# EAGLE board OpenBook (EAGLE 9.7.0)
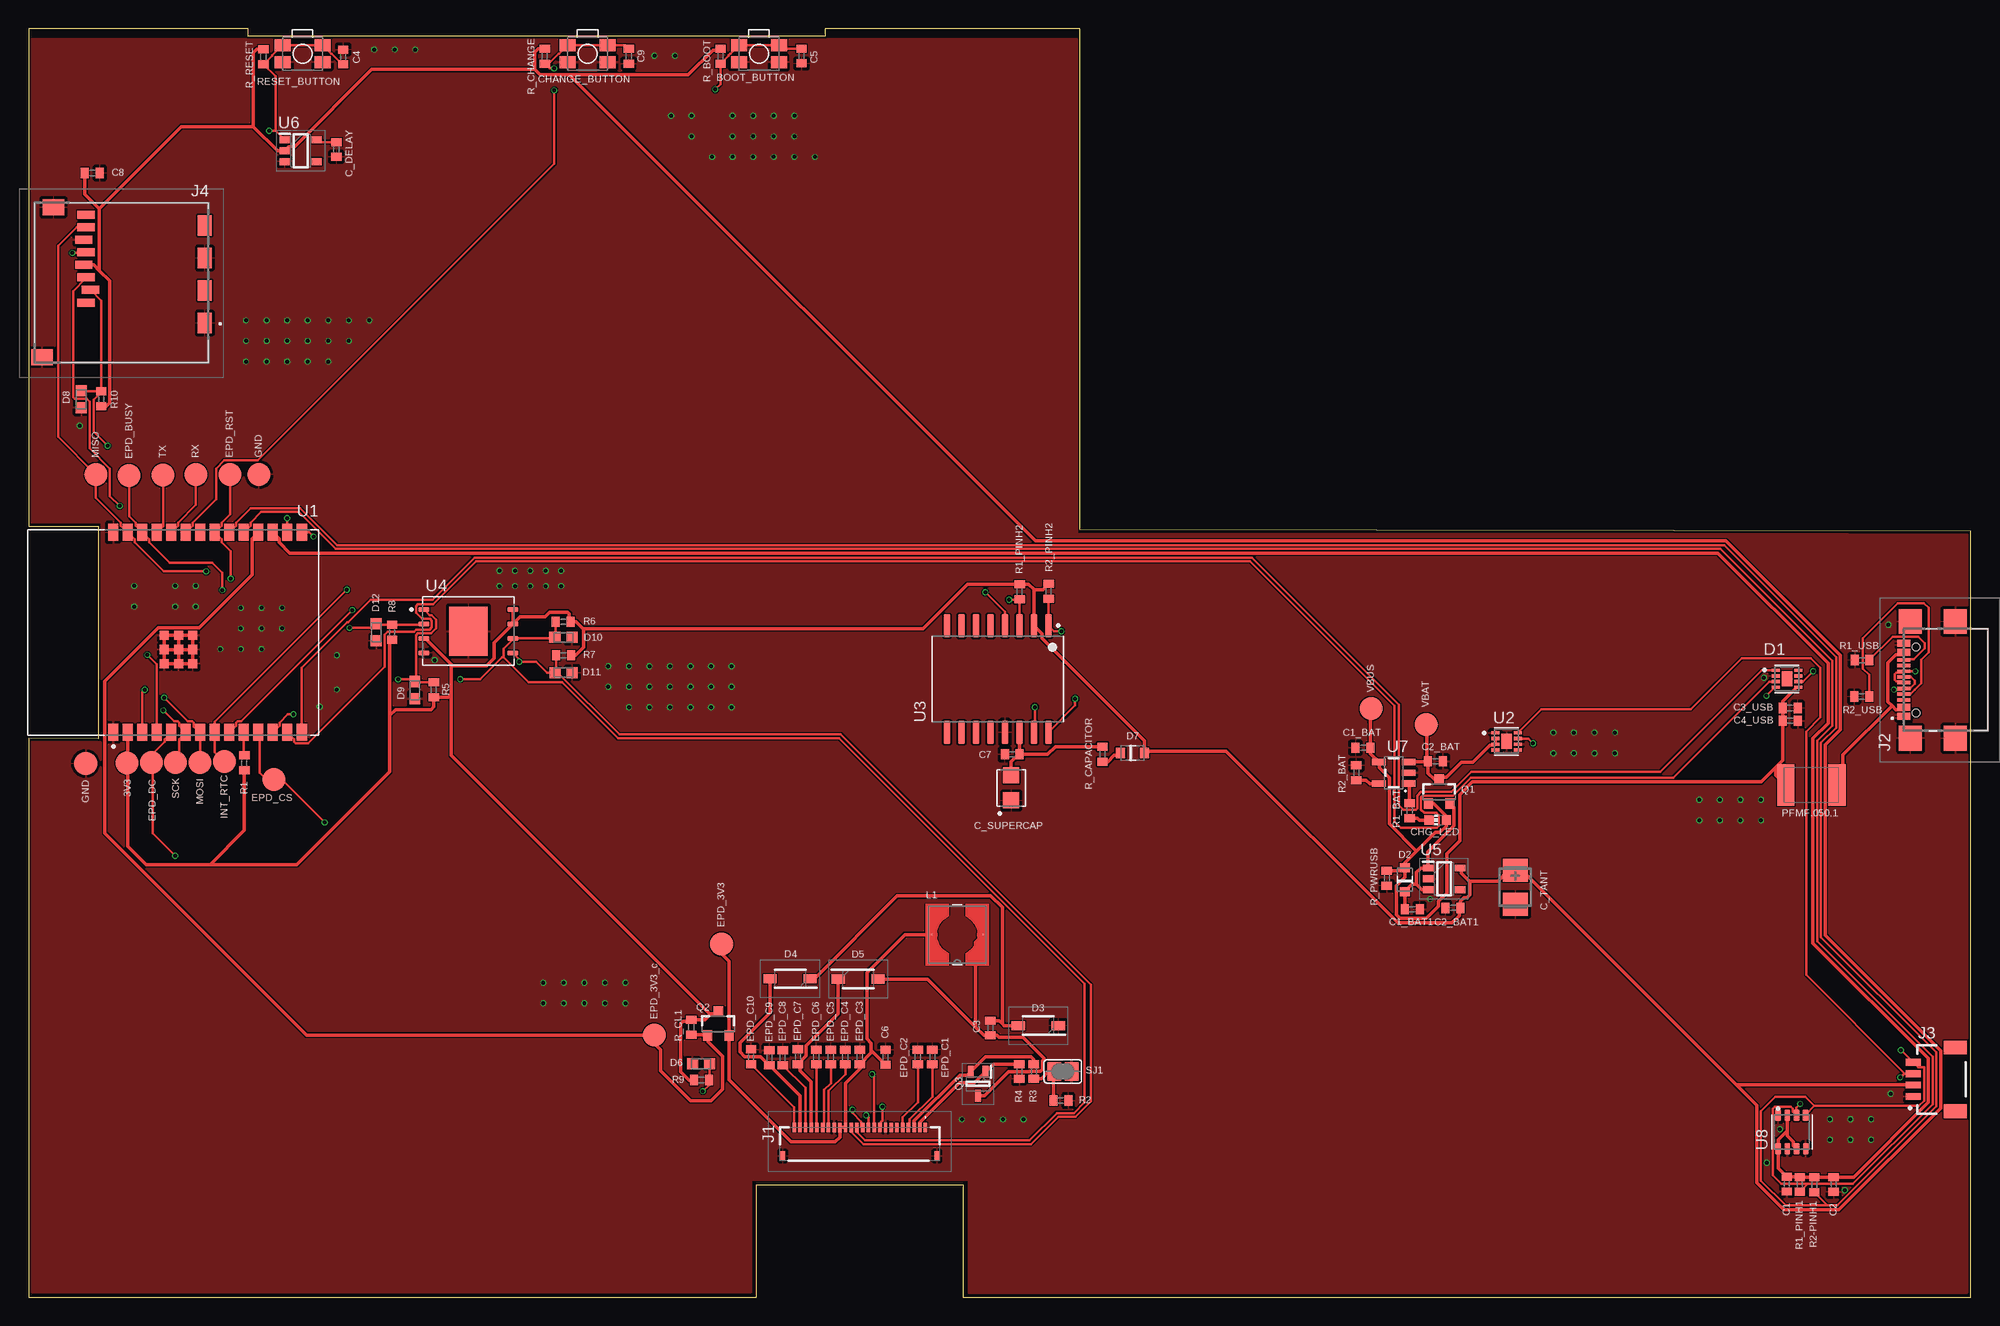
[diagram p0: board, top side]
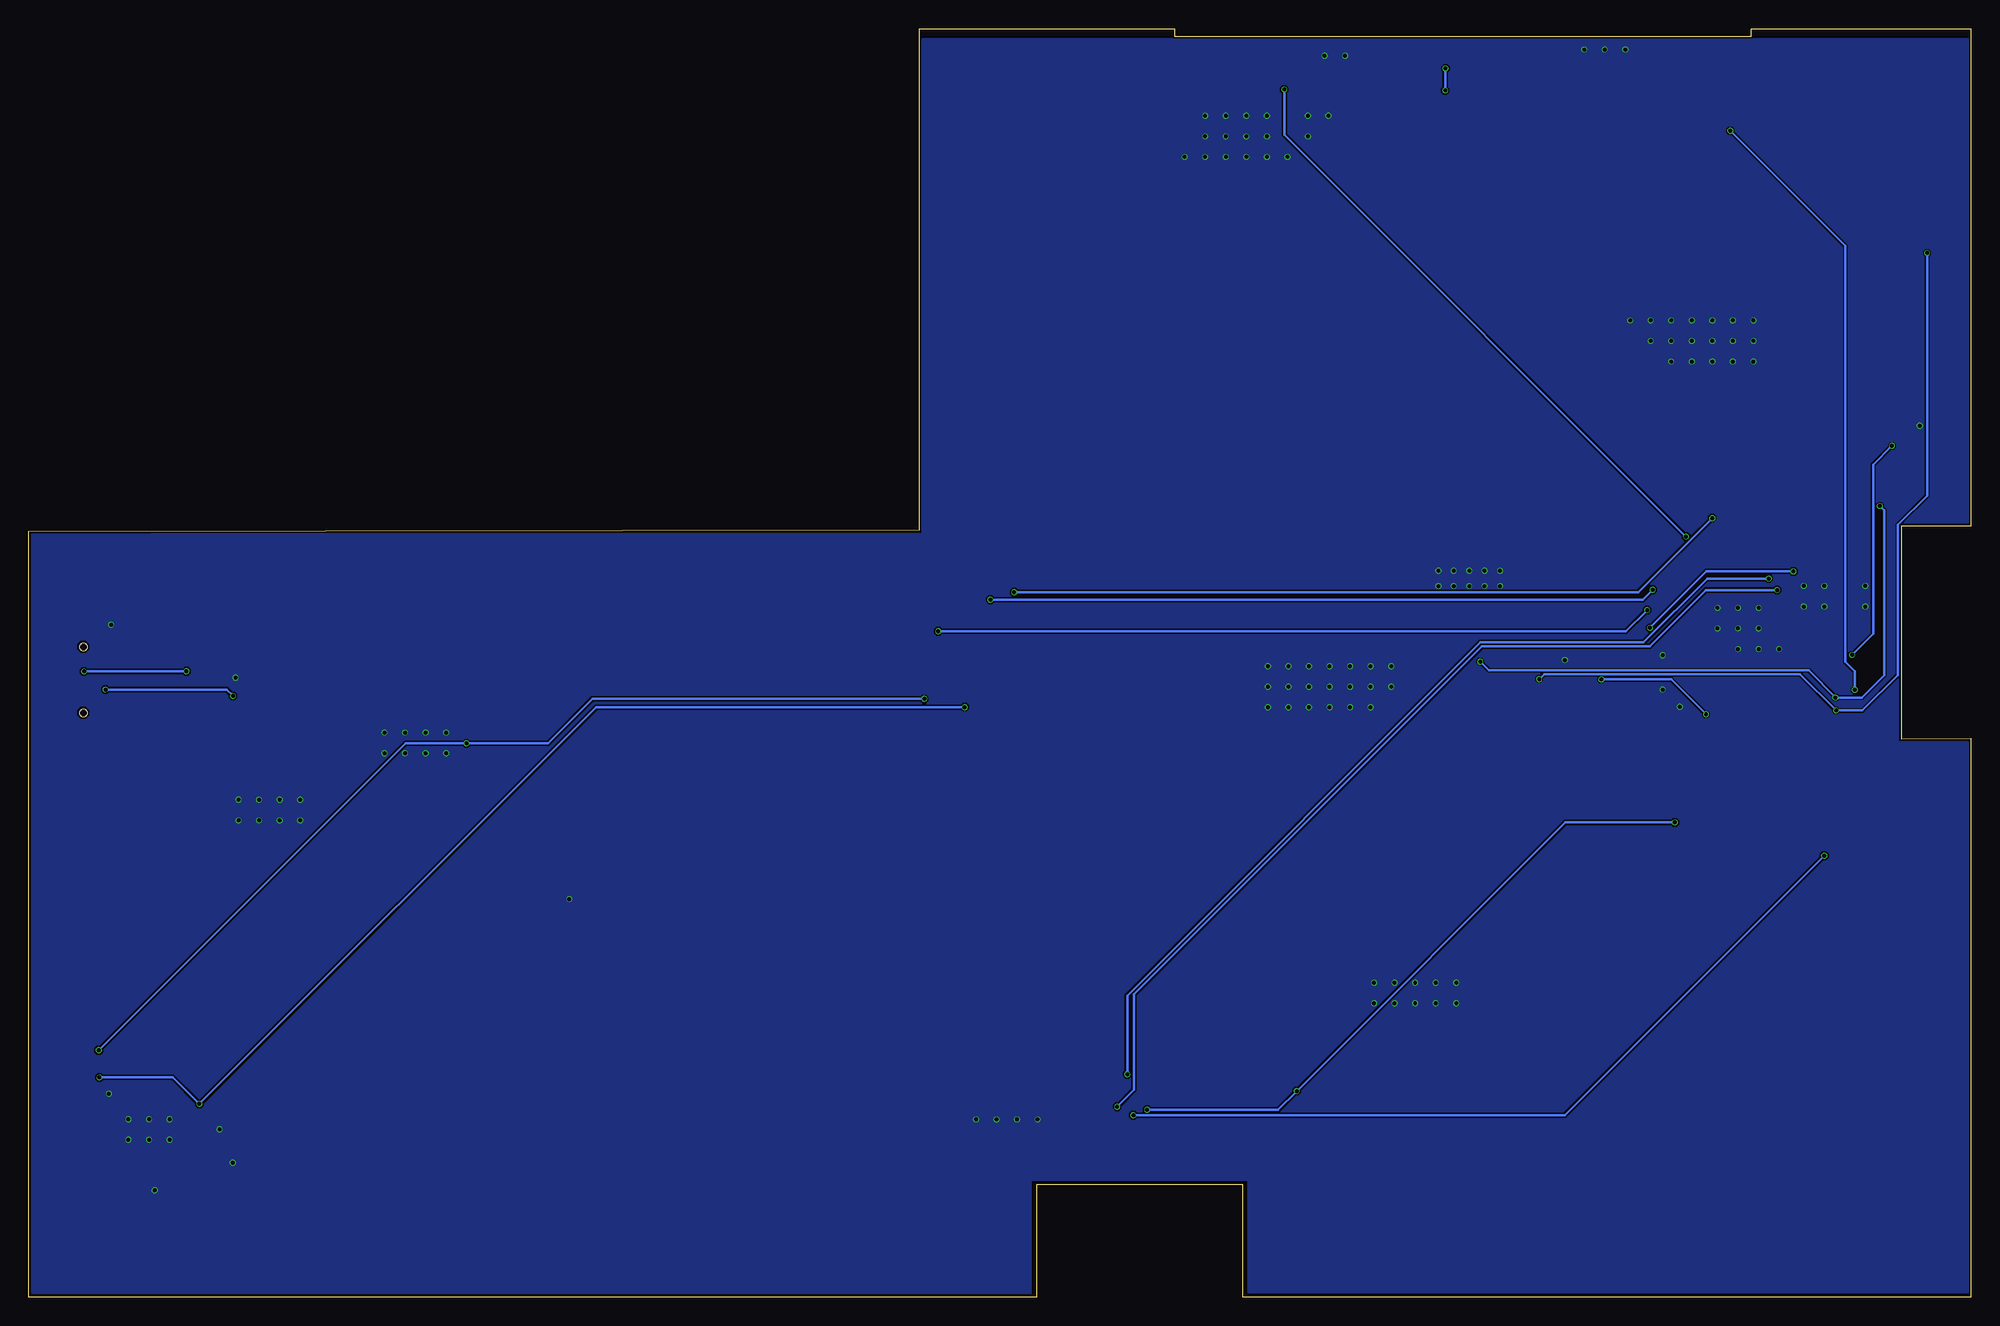
[diagram p1: board, bottom side, seen from below]

Size 170.08 x 111.07 mm. Coordinates in mm from the lower left corner, seen from the top.
Outline: 0,0 63.76,0 63.76,9.87 81.82,9.87 81.82,0.01 131.18,0 170.08,0 170.08,67.07 92.07,67.2 92.07,111.07 69.75,111.07 69.75,110.38 19.21,110.38 19.21,111.07 0,111.07 0,67.51 6.11,67.5 6.11,48.92 0,48.93 0,0
Outline: 0,0 0,0
Copper layers (1*16): Top / Bottom
Stack-up Default Layer Stack: Top User Defined 0.035mm / Dielectric-1 Core:086 1mm / Bottom User Defined 0.035mm
Design rules: minimum copper width 0.2mm, minimum drill size 0.3mm, copper clearance wire_polygon to wire_polygon 5mil, copper clearance wire_polygon to pad_smd 5mil, copper clearance wire_polygon to via 5mil, copper clearance pad_smd to pad_smd 5mil, copper clearance pad_smd to via 5mil, copper clearance via to via 5mil, copper clearance smd to pad (same net) 5mil, copper clearance smd to via (same net) 5mil, copper clearance smd to smd (same net) 5mil, dimension clearance 0.2mm, restrict clearance 0mil, via restrict clearance 0mil, solder-mask clearance 0mil, drill distance 6mil, keepout clearance 0mil

## Footprints (pad centres in the part's own frame; a part is rotated, then mirrored left to right if it is on the bottom)
MYBUTTON = smd 1.4 x 1.05: 1 1.75,0.75; 2 -1.75,0.75; 3 -1.75,-0.75; 4 1.75,-0.75
EAGLE-LTSPICE_C0402 = smd 0.7 x 0.9: 1 -0.65,0; 2 0.65,0
CAPCP3225X100N = smd 1.4 x 1.4: 1 -1.1,0; 2 1.1,0
RCL_CT3528 = smd 2 x 2.2: + -1.5,0; - 1.5,0
ADAFRUIT_CHIP-LED0603 = smd 0.8 x 0.8: A 0,-0.75; C 0,0.75
SON50P200X200X80-9N = smd 0.76 x 0.27: 1 -0.985,0.75; 2 -0.985,0.25; 3 -0.985,-0.25; 4 -0.985,-0.75; 5 0.985,-0.75; 6 0.985,-0.25; 7 0.985,0.25; 8 0.985,0.75 | smd 0.9 x 1.3: 9 0,0
ESP32_WROVER_AVX---SD0805S020S1R0_AVX_SD0805S020S1R0_0 = smd 0.8 x 0.9: 1 -1.05,0; 2 1.05,0
SOD3716X135N = smd 1.15 x 0.8: 1 -1.75,0; 2 1.75,0
DIOC1608X36N = smd 0.97 x 0.94: 1 -0.75,0; 2 0.75,0
FH34SRJ24S05SH99 = smd 0.3 x 0.8: 1 5.75,1.45; 2 5.25,1.45; 3 4.75,1.45; 4 4.25,1.45; 5 3.75,1.45; 6 3.25,1.45; 7 2.75,1.45; 8 2.25,1.45; 9 1.75,1.45; 10 1.25,1.45; 11 0.75,1.45; 12 0.25,1.45; 13 -0.25,1.45; 14 -0.75,1.45; 15 -1.25,1.45; 16 -1.75,1.45; 17 -2.25,1.45; 18 -2.75,1.45; 19 -3.25,1.45; 20 -3.75,1.45; 21 -4.25,1.45; 22 -4.75,1.45; 23 -5.25,1.45; 24 -5.75,1.45 | smd 0.4 x 0.8: MP1 6.75,-1.05; MP2 -6.75,-1.05
SAMACSYS_PARTS_USB4110GFA = smd 0.3 x 1.15: A1 -3.35,3.678; A4 -2.55,3.678; A5 -1.25,3.678; A6 -0.25,3.678; A7 0.25,3.678; A8 1.25,3.678; A9 2.55,3.678; A12 3.35,3.678; B1 3.05,3.678; B4 2.25,3.678; B5 1.75,3.678; B6 0.75,3.678; B7 -0.75,3.678; B8 -1.75,3.678; B9 -2.25,3.678; B12 -3.05,3.678 | smd 2.18 x 2: MP1 -5.11,-0.827; MP2 5.11,-0.827; MP3 -5.11,3.103; MP4 5.11,3.103 | hole 0.65: -2.89,2.603; 2.89,2.603
JST04_1MM_RA = smd 0.6 x 1.35: 1 -1.5,0; 2 -0.5,0; 3 0.5,0; 4 1.5,0 | smd 1.2 x 2: NC1 2.8,-3.675; NC2 -2.8,-3.675
112ATAARR03ATTEND = smd 1.8 x 1.2: G1 10.6,10.4; G2 4.9,10.4; S1 7.75,10.4; S2 2.05,10.4 | smd 1.4 x 1.9: G3 13.6,-3.85; G4 0.45,-2.85 | smd 0.7 x 1.5: P1 8.8,0; P2 7.7,0.4; P3 6.6,0; P4 5.5,-0.2; P5 4.4,0; P6 3.3,-0.2; P7 2.2,0; P8 1.1,0
IND_4828-WE-TPC_WRE = smd 0.127 x 0.127: 1 -2.286,0; 2 2.286,0
ESP32C6_VARISTOR_CT/CN1812 = smd 1.5 x 3.6: 1 -2.25,0; 2 2.25,0
ESP32_WROVER_SPARKFUN-DISCRETESEMI_SOT23-3 = smd 0.8 x 0.9: 1 -0.95,-1; 2 0.95,-1; 3 0,1.1
SOT65P210X110-3N = smd 1.05 x 0.5: 1 -1.05,0.65; 2 -1.05,-0.65; 3 1.05,0
ESP32_WROVER_EAGLE-LTSPICE_R0402 = smd 0.7 x 0.9: 1 -0.65,0; 2 0.65,0
SJ = smd 1.168 x 1.6: 1 -0.762,0; 2 0.762,0
TP20R = smd 2 x 2: TP 0,0
XCVR_ESP32-C6-WROOM-1-N8 = smd 1.5 x 0.9: 1 -8.75,5.26; 2 -8.75,3.99; 3 -8.75,2.72; 4 -8.75,1.45; 5 -8.75,0.18; 6 -8.75,-1.09; 7 -8.75,-2.36; 8 -8.75,-3.63; 9 -8.75,-4.9; 10 -8.75,-6.17; 11 -8.75,-7.44; 12 -8.75,-8.71; 13 -8.75,-9.98; 14 -8.75,-11.25; 15 8.75,-11.25; 16 8.75,-9.98; 17 8.75,-8.71; 18 8.75,-7.44; 19 8.75,-6.17; 20 8.75,-4.9; 21 8.75,-3.63; 22 8.75,-2.36; 23 8.75,-1.09; 24 8.75,0.18; 25 8.75,1.45; 26 8.75,2.72; 27 8.75,3.99; 28 8.75,5.26 | smd 0.8 x 0.8: 29_1 -2.755,0.79; 29_2 -1.505,0.79; 29_3 -0.255,0.79; 29_4 -2.755,-0.46; 29_5 -1.505,-0.46; 29_6 -0.255,-0.46; 29_7 -2.755,-1.71; 29_8 -1.505,-1.71; 29_9 -0.255,-1.71
SOIC127P1032X265-16N = smd 2.05 x 0.59: 1 -4.655,4.445; 2 -4.655,3.175; 3 -4.655,1.905; 4 -4.655,0.635; 5 -4.655,-0.635; 6 -4.655,-1.905; 7 -4.655,-3.175; 8 -4.655,-4.445; 9 4.655,-4.445; 10 4.655,-3.175; 11 4.655,-1.905; 12 4.655,-0.635; 13 4.655,0.635; 14 4.655,1.905; 15 4.655,3.175; 16 4.655,4.445
SON127P600X800X80-9N = smd 0.94 x 0.44: 1 -3.895,1.905; 2 -3.895,0.635; 3 -3.895,-0.635; 4 -3.895,-1.905; 5 3.895,-1.905; 6 3.895,-0.635; 7 3.895,0.635; 8 3.895,1.905 | smd 3.4 x 4.3: 9 0,0
SOT95P280X120-5N = smd 0.9 x 0.6: 1 -1.4,0.95; 2 -1.4,0; 3 -1.4,-0.95; 4 1.4,-0.95; 5 1.4,0.95
SOT95P280X125-5N = smd 0.9 x 0.6: 1 -1.4,0.95; 2 -1.4,0; 3 -1.4,-0.95; 4 1.4,-0.95; 5 1.4,0.95
ESP32_WROVER_SPARKFUN-IC-POWER_SOT23-5 = smd 0.55 x 1.2: 1 -0.95,-1.3; 2 0,-1.3; 3 0.95,-1.3; 4 0.95,1.3; 5 -0.95,1.3
ESP32_WROVER_BME680_PSON80P300X300X100-8N = smd 1.016 x 0.5: 1 1.458,1.2; 2 1.458,0.4; 3 1.458,-0.4; 4 1.458,-1.2; 5 -1.458,-1.22; 6 -1.458,-0.4; 7 -1.458,0.4; 8 -1.458,1.2

## Placement (x,y rotation side)
BOOT_BUTTON  [MYBUTTON]  63.95,108.87 180 top
C1  100nF  [EAGLE-LTSPICE_C0402]  153.95,9.92 270 top
C1_BAT  4.7uF  [EAGLE-LTSPICE_C0402]  116.84,48.11 180 top
C1_BAT1  4.7uF  [EAGLE-LTSPICE_C0402]  121.16,33.98 0 top
C2  100nF  [EAGLE-LTSPICE_C0402]  158.05,9.88 270 top
C2_BAT  4.7uF  [EAGLE-LTSPICE_C0402]  123.19,46.93 0 top
C2_BAT1  4.7uF  [EAGLE-LTSPICE_C0402]  124.73,34.09 180 top
C3  4.7uF/25V  [EAGLE-LTSPICE_C0402]  84.22,23.59 270 top
C3_USB  100nF  [EAGLE-LTSPICE_C0402]  154.26,51.6 0 top
C4  1uF  [EAGLE-LTSPICE_C0402]  27.55,108.58 90 top
C4_USB  4.7uF  [EAGLE-LTSPICE_C0402]  154.26,50.48 0 top
C5  100nF  [EAGLE-LTSPICE_C0402]  67.69,108.67 270 top
C6  10uF  [EAGLE-LTSPICE_C0402]  75.03,21.04 90 top
C7  100nF  [EAGLE-LTSPICE_C0402]  86.13,47.54 180 top
C8  100nF  [EAGLE-LTSPICE_C0402]  5.59,98.43 0 top
C9  100nF  [EAGLE-LTSPICE_C0402]  52.56,108.66 270 top
C_DELAY  100nF  [EAGLE-LTSPICE_C0402]  26.95,100.49 270 top
C_SUPERCAP  CPH3225A  [CAPCP3225X100N]  86.04,44.6 90 top
C_TANT  100uF  [RCL_CT3528]  130.18,35.9 270 top
CHANGE_BUTTON  [MYBUTTON]  48.95,108.87 180 top
CHG_LED  [ADAFRUIT_CHIP-LED0603]  123.39,41.79 90 top
D1  USBLC6-2SC6Y  [SON50P200X200X80-9N]  153.97,54.15 0 top
D2  ESP32_WROVER_AVX---SD0805S020S1R0_AVX_SD0805S020S1R0_0_0AVX_SD0805S020S1R0_0_0  [ESP32_WROVER_AVX---SD0805S020S1R0_AVX_SD0805S020S1R0_0]  120.51,36.57 90 top
D3  MBR0530  [SOD3716X135N]  88.41,23.79 180 top
D4  MBR0530  [SOD3716X135N]  66.69,27.89 180 top
D5  MBR0530  [SOD3716X135N]  72.65,27.87 0 top
D6  PGB1010603MR  [DIOC1608X36N]  58.88,20.45 0 top
D7  ESP32_WROVER_AVX---SD0805S020S1R0_AVX_SD0805S020S1R0_0_0AVX_SD0805S020S1R0_0_0  [ESP32_WROVER_AVX---SD0805S020S1R0_AVX_SD0805S020S1R0_0]  96.66,47.66 0 top
D8  PGB1010603MR  [DIOC1608X36N]  4.61,78.63 90 top
D9  PGB1010603MR  [DIOC1608X36N]  33.82,53.16 90 top
D10  PGB1010603MR  [DIOC1608X36N]  46.83,57.78 180 top
D11  PGB1010603MR  [DIOC1608X36N]  46.86,54.69 180 top
D12  PGB1010603MR  [DIOC1608X36N]  30.44,58.21 90 top
EPD_C1  1uF/50V  [EAGLE-LTSPICE_C0402]  79.14,21.05 270 top
EPD_C2  1uF/50V  [EAGLE-LTSPICE_C0402]  77.87,21.05 270 top
EPD_C3  0.1uF/50V  [EAGLE-LTSPICE_C0402]  72.79,21.05 270 top
EPD_C4  1uF/50V  [EAGLE-LTSPICE_C0402]  71.52,21.05 270 top
EPD_C5  1uF/50V  [EAGLE-LTSPICE_C0402]  70.25,21.05 270 top
EPD_C6  1uF/50V  [EAGLE-LTSPICE_C0402]  68.98,21.05 270 top
EPD_C7  1uF/50V  [EAGLE-LTSPICE_C0402]  67.36,21.07 270 top
EPD_C8  1uF/50V  [EAGLE-LTSPICE_C0402]  66.03,20.99 270 top
EPD_C9  1uF/50V  [EAGLE-LTSPICE_C0402]  64.87,20.98 270 top
EPD_C10  1uF/50V  [EAGLE-LTSPICE_C0402]  63.27,21.06 270 top
J1  FH34SRJ-24S-0.5SH_99_  [FH34SRJ24S05SH99]  72.79,13.43 0 top
J2  SAMACSYS_PARTS_USB4110-GF-A  [SAMACSYS_PARTS_USB4110GFA]  167.88,54.06 90 top
J3  QWIIC_RIGHT_ANGLE  [JST04_1MM_RA]  165.03,19.09 90 top
J4  112A-TAAR-R03_ATTEND  [112ATAARR03ATTEND]  5.03,95.89 270 top
L1  68uH  [IND_4828-WE-TPC_WRE]  81.32,31.75 180 top
PFMF.050.1  ESP32C6_VARISTORCN1812  [ESP32C6_VARISTOR_CT/CN1812]  156.1,44.85 180 top
Q1  20V/4.2A/52mΩ/1.4W  [ESP32_WROVER_SPARKFUN-DISCRETESEMI_SOT23-3]  123.51,44.24 0 top
Q2  20V/4.2A/52mΩ/1.4W  [ESP32_WROVER_SPARKFUN-DISCRETESEMI_SOT23-3]  60.39,23.93 0 top
Q3  SI1308EDL-T1-GE3  [SOT65P210X110-3N]  83.14,18.69 270 top
R1  10K  [ESP32_WROVER_EAGLE-LTSPICE_R0402]  18.9,46.79 270 top
R1_BAT  200  [ESP32_WROVER_EAGLE-LTSPICE_R0402]  120.93,42.61 90 top
R1_PINH1  10K  [ESP32_WROVER_EAGLE-LTSPICE_R0402]  155.1,9.88 90 top
R1_PINH2  10K  [ESP32_WROVER_EAGLE-LTSPICE_R0402]  86.78,61.78 90 top
R1_USB  5k1  [ESP32_WROVER_EAGLE-LTSPICE_R0402]  160.55,55.79 180 top
R2  2.2  [ESP32_WROVER_EAGLE-LTSPICE_R0402]  90.39,17.24 0 top
R2-PINH1  10K  [ESP32_WROVER_EAGLE-LTSPICE_R0402]  156.35,9.86 90 top
R2_BAT  2K  [ESP32_WROVER_EAGLE-LTSPICE_R0402]  116.26,45.94 270 top
R2_PINH2  10K  [ESP32_WROVER_EAGLE-LTSPICE_R0402]  89.32,61.8 90 top
R2_USB  5k1  [ESP32_WROVER_EAGLE-LTSPICE_R0402]  160.51,52.6 0 top
R3  0.47  [ESP32_WROVER_EAGLE-LTSPICE_R0402]  88.03,19.78 90 top
R4  10K  [ESP32_WROVER_EAGLE-LTSPICE_R0402]  86.76,19.78 90 top
R5  10K  [ESP32_WROVER_EAGLE-LTSPICE_R0402]  35.48,53.19 270 top
R6  10K  [ESP32_WROVER_EAGLE-LTSPICE_R0402]  46.82,59.14 0 top
R7  10K  [ESP32_WROVER_EAGLE-LTSPICE_R0402]  46.84,56.22 0 top
R8  10K  [ESP32_WROVER_EAGLE-LTSPICE_R0402]  31.84,58.21 270 top
R9  10K  [ESP32_WROVER_EAGLE-LTSPICE_R0402]  58.92,19.03 180 top
R10  10K  [ESP32_WROVER_EAGLE-LTSPICE_R0402]  6.37,78.66 270 top
R_BOOT  10K  [ESP32_WROVER_EAGLE-LTSPICE_R0402]  60.59,108.65 90 top
R_CAPACITOR  15  [ESP32_WROVER_EAGLE-LTSPICE_R0402]  94.04,47.56 90 top
R_CHANGE  10K  [ESP32_WROVER_EAGLE-LTSPICE_R0402]  45.2,108.65 90 top
R_CL1  10K  [ESP32_WROVER_EAGLE-LTSPICE_R0402]  58.03,23.65 90 top
R_PWRUSB  100K  [ESP32_WROVER_EAGLE-LTSPICE_R0402]  118.92,36.7 90 top
R_RESET  10K  [ESP32_WROVER_EAGLE-LTSPICE_R0402]  20.56,108.61 90 top
RESET_BUTTON  [MYBUTTON]  23.99,108.87 180 top
SJ1  [SJ]  90.57,19.78 180 top
TP1  TPTP20R  [TP20R]  11.77,71.98 0 top
TP2  TPTP20R  [TP20R]  14.65,72.03 0 top
TP3  TPTP20R  [TP20R]  122.38,50.15 0 top
TP4  TPTP20R  [TP20R]  5.01,46.74 0 top
TP5  TPTP20R  [TP20R]  20.17,72.03 0 top
TP6  TPTP20R  [TP20R]  5.9,72.04 0 top
TP7  TPTP20R  [TP20R]  15.01,46.81 0 top
TP8  TPTP20R  [TP20R]  12.88,46.81 0 top
TP9  TPTP20R  [TP20R]  8.81,71.94 0 top
TP10  TPTP20R  [TP20R]  21.49,45.35 0 top
TP11  TPTP20R  [TP20R]  10.76,46.83 0 top
TP12  TPTP20R  [TP20R]  17.64,72.05 0 top
TP13  TPTP20R  [TP20R]  54.79,22.96 0 top
TP14  TPTP20R  [TP20R]  117.55,51.55 0 top
TP15  TPTP20R  [TP20R]  17.14,46.89 0 top
TP16  TPTP20R  [TP20R]  8.63,46.8 0 top
TP17  TPTP20R  [TP20R]  60.68,30.92 0 top
U1  ESP32-C6-WROOM-1-N8  [XCVR_ESP32-C6-WROOM-1-N8]  12.67,58.22 90 top
U2  MAX17048G+T10  [SON50P200X200X80-9N]  129.41,48.67 0 top
U3  DS3231SN#  [SOIC127P1032X265-16N]  84.86,54.13 270 top
U4  W25Q512JVEIQ  [SON127P600X800X80-9N]  38.51,58.32 0 top
U5  XC6220A331MR-G  [SOT95P280X120-5N]  123.94,36.63 0 top
U6  BD5229G-TR  [SOT95P280X125-5N]  23.83,100.38 0 top
U7  MCP73831  [ESP32_WROVER_SPARKFUN-IC-POWER_SOT23-5]  119.53,45.93 90 top
U8  BME688  [ESP32_WROVER_BME680_PSON80P300X300X100-8N]  154.4,14.48 90 top

## Library data of the parts
BOOT_BUTTON C1 C1_BAT C1_BAT1 C2 C2_BAT C2_BAT1 C3 C3_USB C4 C4_USB C5-C9 C_DELAY C_SUPERCAP CHANGE_BUTTON CHG_LED D2 D7 EPD_C1-EPD_C10 J4 L1 PFMF.050.1 RESET_BUTTON SJ1 U1 U3 U6 = DeskAssistant v19 v1
C_TANT = DeskAssistant v19 v1; SPICEPREFIX: C
D1 = DeskAssistant v19 v1; AVAILABILITY: In Stock; CHECK_PRICES: https://www.snapeda.com/parts/USBLC6-2SC6Y/STMicroelectronics/view-part/?ref=eda; DESCRIPTION: 17V Clamp 5A (8/20µs) Ipp Tvs Diode Surface Mount SOT-23-6; FF: FF; MF: STMicroelectronics; MP: USBLC6-2SC6Y; PACKAGE: SOT-23-6 STMicroelectronics; PRICE: None; SNAPEDA_LINK: https://www.snapeda.com/parts/USBLC6-2SC6Y/STMicroelectronics/view-part/?ref=snap
D3-D5 = DeskAssistant v19 v1; AVAILABILITY: In Stock; CHECK_PRICES: https://www.snapeda.com/parts/MBR0530/Onsemi/view-part/?ref=eda; DESCRIPTION: Diode Schottky 30 V 500mA Surface Mount SOD-123; MF: ON Semiconductor; MP: MBR0530; PACKAGE: SOD-123-2 ON Semiconductor; PRICE: None; PURCHASE-URL: https://www.snapeda.com/api/url_track_click_mouser/?unipart_id=179458&manufacturer=ON Semiconductor&part_name=MBR0530&search_term=None; SNAPEDA_LINK: https://www.snapeda.com/parts/MBR0530/Onsemi/view-part/?ref=snap
D6 D8-D12 = DeskAssistant v19 v1; AVAILABILITY: In Stock; CHECK_PRICES: https://www.snapeda.com/parts/PGB1010603MR/Littelfuse/view-part/?ref=eda; DESCRIPTION: 150V (Typ) Clamp - Ipp Tvs Diode Surface Mount 0603 (1608 Metric); MF: Littelfuse Inc.; MP: PGB1010603MR; PACKAGE: 0603 Littelfuse Inc.; PRICE: None; PURCHASE-URL: https://www.snapeda.com/api/url_track_click_mouser/?unipart_id=5659453&manufacturer=Littelfuse Inc.&part_name=PGB1010603MR&search_term=None; SNAPEDA_LINK: https://www.snapeda.com/parts/PGB1010603MR/Littelfuse/view-part/?ref=snap
J1 = DeskAssistant v19 v1; DESCRIPTION: 24 Position FFC, FPC Connector Contacts, Top and Bottom 0.020" (0.50mm) Surface Mount, Right Angle; HEIGHT: 1.1mm; MANUFACTURER_NAME: Hirose; MANUFACTURER_PART_NUMBER: FH34SRJ-24S-0.5SH(99); MOUSER_PART_NUMBER: 798-FH34SRJ24S05SH99; MOUSER_PRICE-STOCK: https://www.mouser.co.uk/ProductDetail/Hirose-Connector/FH34SRJ-24S-0.5SH99?qs=vcbW%252B4%252BSTIpKBl5ap9J8Fw%3D%3D
J2 = DeskAssistant v19 v1; DESCRIPTION: CONN USB 2.0 TYPE-C R/A SMT; HEIGHT: 3.26mm; MANUFACTURER_NAME: GCT (GLOBAL CONNECTOR TECHNOLOGY); MANUFACTURER_PART_NUMBER: USB4110-GF-A; MOUSER_PART_NUMBER: 640-USB4110-GF-A; MOUSER_PRICE-STOCK: https://www.mouser.co.uk/ProductDetail/GCT/USB4110-GF-A?qs=KUoIvG%2F9IlYiZvIXQjyJeA%3D%3D
J3 = DeskAssistant v19 v1; PROD_ID: CONN-13694
Q1 Q2 = DeskAssistant v19 v1; PROD_ID: DMG2305UX-7
Q3 = DeskAssistant v19 v1; AVAILABILITY: In Stock; CHECK_PRICES: https://www.snapeda.com/parts/SI1308EDL-T1-GE3/Vishay+Siliconix/view-part/?ref=eda; DESCRIPTION: Si1308EDL-T1-GE3 N-channel MOSFET Transistor, 1.5 A, 30 V, 3-Pin SC-70 | Siliconix / Vishay SI1308EDL-T1-GE3; MF: Vishay Siliconix; MP: SI1308EDL-T1-GE3; PACKAGE: SOT-323 Vishay Semiconductor; PRICE: None; PURCHASE-URL: https://www.snapeda.com/api/url_track_click_mouser/?unipart_id=274603&manufacturer=Vishay Siliconix&part_name=SI1308EDL-T1-GE3&search_term=None; SNAPEDA_LINK: https://www.snapeda.com/parts/SI1308EDL-T1-GE3/Vishay+Siliconix/view-part/?ref=snap
R1 R1_BAT R1_PINH1 R1_PINH2 R1_USB R2 R2-PINH1 R2_BAT R2_PINH2 R2_USB R3-R10 R_BOOT R_CAPACITOR R_CHANGE R_CL1 R_PWRUSB R_RESET = DeskAssistant v19 v1; SPICEMODEL: NONE; SPICEPREFIX: R
TP1 = DeskAssistant v19 v1; TP_SIGNAL_NAME: TX
TP2 = DeskAssistant v19 v1; TP_SIGNAL_NAME: RX
TP3 = DeskAssistant v19 v1; TP_SIGNAL_NAME: VBAT
TP4 TP5 = DeskAssistant v19 v1; TP_SIGNAL_NAME: GND
TP6 = DeskAssistant v19 v1; TP_SIGNAL_NAME: MISO
TP7 = DeskAssistant v19 v1; TP_SIGNAL_NAME: MOSI
TP8 = DeskAssistant v19 v1; TP_SIGNAL_NAME: SCK
TP9 = DeskAssistant v19 v1; TP_SIGNAL_NAME: EPD_BUSY
TP10 = DeskAssistant v19 v1; TP_SIGNAL_NAME: EPD_CS
TP11 = DeskAssistant v19 v1; TP_SIGNAL_NAME: EPD_DC
TP12 = DeskAssistant v19 v1; TP_SIGNAL_NAME: EPD_RST
TP13 = DeskAssistant v19 v1; TP_SIGNAL_NAME: EPD_3V3_c
TP14 = DeskAssistant v19 v1; TP_SIGNAL_NAME: VBUS
TP15 = DeskAssistant v19 v1; TP_SIGNAL_NAME: INT_RTC
TP16 = DeskAssistant v19 v1; TP_SIGNAL_NAME: 3V3
TP17 = DeskAssistant v19 v1; TP_SIGNAL_NAME: EPD_3V3
U2 = DeskAssistant v19 v1; AVAILABILITY: In Stock; CHECK_PRICES: https://www.snapeda.com/parts/MAX17048G+T10/Analog+Devices/view-part/?ref=eda; DESCRIPTION: 3µA 1-Cell/2-Cell Fuel Gauge with ModelGauge; MF: Analog Devices; MP: MAX17048G+T10; PACKAGE: TDFN-8 Maxim; PRICE: None; PURCHASE-URL: https://www.snapeda.com/api/url_track_click_mouser/?unipart_id=329239&manufacturer=Analog Devices&part_name=MAX17048G+T10&search_term=None; SNAPEDA_LINK: https://www.snapeda.com/parts/MAX17048G+T10/Analog+Devices/view-part/?ref=snap
U4 = DeskAssistant v19 v1; AVAILABILITY: In Stock; CHECK_PRICES: https://www.snapeda.com/parts/W25Q512JVEIQ/Winbond+Electronics/view-part/?ref=eda; DESCRIPTION: FLASH - NOR Memory IC 512Mb (64M x 8) SPI - Quad I/O 133 MHz 8-WSON (8x6); MF: Winbond Electronics; MP: W25Q512JVEIQ; PACKAGE: Package; PRICE: None; SNAPEDA_LINK: https://www.snapeda.com/parts/W25Q512JVEIQ/Winbond+Electronics/view-part/?ref=snap
U5 = DeskAssistant v19 v1; DESCRIPTION: LDO Voltage Regulators; HEIGHT: 1.2mm; MANUFACTURER_NAME: Torex; MANUFACTURER_PART_NUMBER: XC6220A331MR-G; MOUSER_PART_NUMBER: 865-XC6220A331MR-G; MOUSER_PRICE-STOCK: https://www.mouser.co.uk/ProductDetail/Torex-Semiconductor/XC6220A331MR-G?qs=AsjdqWjXhJ8ZSWznL1J0gg%3D%3D
U7 = DeskAssistant v19 v1; PROD_ID: IC-09995
U8 = DeskAssistant v19 v1; AVAILABILITY: Unavailable; DESCRIPTION: Integrated Environmental Unit; MF: Bosch Sensortec; MP: BME680; PACKAGE: LGA-8 Bosch Tools; PRICE: None

## Nets
3V3: C2_BAT1.1 C8.1 C_TANT.+ D7.2 J3.2 J4.P4 Q2.3 R1.2 R1_PINH2.2 R2_PINH2.2 R5.2 R6.2 R7.2 R8.2 R9.2 R10.2 R_BOOT.2 R_CHANGE.2 R_CL1.2 R_RESET.2 TP16.TP U1.2 U3.2 U4.3 U4.7 U4.8 U5.5 U6.2
32KHZ: R2_PINH2.1 U1.9 U3.1
DN: D1.4 J2.A7 J2.B7
DP: D1.6 J2.A6 J2.B6
EPD_3V3: C6.1 EPD_C3.2 J1.15 J1.16 L1.2 Q2.2 TP17.TP
EPD_3V3_C: Q2.1 R_CL1.1 TP13.TP U1.18
EPD_BUSY: J1.9 TP9.TP U1.26
EPD_CS: D6.2 J1.12 R9.1 TP10.TP U1.11
EPD_DC: J1.11 TP11.TP U1.5
EPD_RST: J1.10 TP12.TP U1.21
FLASH_CS: D9.2 R5.1 U1.12 U4.1
GDR: J1.2 Q3.1 R4.2
GND: BOOT_BUTTON.1 BOOT_BUTTON.2 C1.2 C1_BAT1.2 C1_BAT.2 C2.2 C2_BAT1.2 C2_BAT.2 C3_USB.2 C4.2 C4_USB.2 C5.2 C6.2 C7.2 C8.2 C9.2 C_DELAY.2 C_SUPERCAP.1 C_TANT.- CHANGE_BUTTON.1 CHANGE_BUTTON.2 D1.2 D3.1 D6.1 D8.1 D9.1 D10.1 D11.1 D12.1 EPD_C1.1 EPD_C2.1 EPD_C3.1 EPD_C4.1 EPD_C5.1 EPD_C6.1 EPD_C7.1 EPD_C8.1 EPD_C9.1 EPD_C10.1 J1.8 J1.17 J1.MP1 J1.MP2 J2.A1 J2.A12 J2.B1 J2.B12 J2.MP1 J2.MP2 J2.MP3 J2.MP4 J3.1 J4.G1 J4.G2 J4.G3 J4.G4 J4.P6 R1_USB.2 R2.2 R2_BAT.1 R2_USB.1 R4.1 R_PWRUSB.1 RESET_BUTTON.1 RESET_BUTTON.2 SJ1.1 TP4.TP TP5.TP U1.1 U1.28 U1.29_1 U1.29_2 U1.29_3 U1.29_4 U1.29_5 U1.29_6 U1.29_7 U1.29_8 U1.29_9 U2.1 U2.4 U2.6 U2.9 U3.13 U4.4 U4.9 U5.2 U6.3 U7.2 U8.1 U8.5 U8.7
GPIO8: R1.1 U1.10
I2C_PW: C1.1 C2.1 R1_PINH1.2 R2-PINH1.2 U1.17 U8.2 U8.6 U8.8
INT_RTC: R1_PINH2.1 TP15.TP U1.8 U3.3
IO/BOOT: BOOT_BUTTON.3 BOOT_BUTTON.4 C5.1 R_BOOT.1 U1.15
IO/CHANGE: C9.1 CHANGE_BUTTON.3 CHANGE_BUTTON.4 R_CHANGE.1 U1.23
MISO: D12.2 J4.P7 R8.1 TP6.TP U1.27 U4.2
MOSI: D11.2 J1.14 J4.P3 R7.1 TP7.TP U1.7 U4.5
N$1: C1_BAT1.1 D2.1 Q1.2 U5.1 U5.3
N$2: R1_BAT.2 U7.1
N$3: C3.1 D3.2 D4.1
N$4: J2.A5 R2_USB.2
N$5: CHG_LED.C R1_BAT.1
N$7: J2.B5 R1_USB.1
N$8: C_DELAY.1 U6.5
N$9: EPD_C8.2 J1.22
N$10: EPD_C6.2 J1.20
N$11: EPD_C4.2 J1.18
N$13: R2_BAT.2 U7.5
N$14: EPD_C5.2 J1.19
N$15: EPD_C10.2 J1.24
N$16: D7.1 R_CAPACITOR.1
N$24: EPD_C2.2 J1.5
N$25: EPD_C1.2 J1.4
PREVGH: D5.1 EPD_C7.2 J1.21
PREVGL: D4.2 EPD_C9.2 J1.23
RESE: J1.3 Q3.2 R3.2
RESE': R2.1 R3.1 SJ1.2
RESET: C4.1 R_RESET.1 RESET_BUTTON.3 RESET_BUTTON.4 U1.3 U6.1
RTC_RST: U1.16 U3.4
RX: TP2.TP U1.24
SCK: D10.2 J1.13 J4.P5 R6.1 TP8.TP U1.6 U4.6
SCL: J3.4 R2-PINH1.1 U1.20 U2.7 U3.16 U8.4
SDA: J3.3 R1_PINH1.1 U1.19 U2.8 U3.15 U8.3
SRC: C3.2 D5.2 L1.1 Q3.3
SS_SD: D8.2 J4.P2 R10.1 U1.4
TX: TP1.TP U1.25
USB_D+: D1.1 U1.14
USB_D-: D1.3 U1.13
VBAT: C2_BAT.1 Q1.3 TP3.TP U2.2 U2.3 U7.3
VBUS: C1_BAT.1 C3_USB.1 C4_USB.1 CHG_LED.A D1.5 D2.2 PFMF.050.1.2 Q1.1 R_PWRUSB.2 TP14.TP U7.4
VRTC: C7.1 C_SUPERCAP.2 R_CAPACITOR.2 U3.14
VUSB: J2.A4 J2.A9 J2.B4 J2.B9 PFMF.050.1.1

## Tracks (layer width: path | path; a pad name or v marks a point on that pad's centre or on a via)
3V3
  Top 0.3: U1.2 8.69,47.67 | R7.2 47.92,56.22 48.62,56.92 48.62,58.47 48.54,58.55 | 48.54,58.55 47.95,59.14 R6.2 47.35,59.27 47.35,59.84 47.19,60 45.64,60 45.24,59.59 43.05,59.59 U4.7 | 59.69,24.77 59.74,24.82 60.18,24.82 Q2.3 | 59.69,24.77 59.22,24.3 R_CL1.2 57.91,24.18 57.33,24.18 57.1,23.95 57.1,19.76 57.83,19.03 R9.2 | 59.69,24.77 37.01,47.45 37.01,52.8 | 31.62,50.95 31.62,46.01 23.49,37.87 15.89,37.87 | 31.62,50.95 31.62,57.38 31.72,57.48 31.76,57.48 R8.2 | R2_PINH2.2 89.32,62.43 88.84,61.95 88.05,61.95 88.02,61.98 | 88.02,61.98 88.02,58.79 U3.2 88.74,58.09 88.74,57.69 97.71,48.72 D7.2 97.88,47.83 104.86,47.83 119.92,32.78 124.65,32.78 125.27,33.4 125.27,33.99 C2_BAT1.1 125.38,34.68 125.68,34.98 125.96,34.98 126.21,35.23 126.21,36.37 | 149.54,18.61 149.52,18.61 151.32,16.81 151.32,10.05 153.7,7.67 158.52,7.67 167.43,16.58 167.43,21.6 157.33,31.7 157.33,48.39 158.65,49.71 158.65,56.21 148.64,66.23 88.16,66.23 47.35,107.04 | 149.54,18.61 130.75,37.4 C_TANT.+ 130.12,37.34 129.54,37.34 128.65,36.45 126.29,36.45 126.21,36.37 | 48.54,58.55 78.34,58.55 82.22,62.43 R1_PINH2.2 87.57,62.43 88.02,61.98 | 44.32,107.5 44.32,107.49 44.78,107.04 47.35,107.04 | 44.32,107.5 44.32,108.99 44.63,109.3 R_CHANGE.2 | 47.35,107.04 57.76,107.04 59.92,109.2 60.49,109.2 R_BOOT.2 | 19.68,102.49 21.8,100.38 U6.2 22.79,100.74 23.29,100.74 30.05,107.5 44.32,107.5 | 19.68,102.49 19.68,108.97 19.98,109.26 R_RESET.2 | R10.2 6.81,78.01 7.1,78.3 7.1,88.99 6.2,89.89 | 6.2,89.89 5.7,90.39 J4.P4 | C8.1 4.94,96.56 6.2,95.3 | 6.2,95.3 6.2,89.89 | 19.68,102.49 13.38,102.49 6.2,95.3 | U5.5 125.45,37.47 125.45,37.14 126.21,36.37
  Top 0.3: 37.01,52.8 36.75,52.54 R5.2 35.49,51.71 35.24,51.46 32.13,51.46 31.62,50.95 | 8.69,47.67 8.69,39.51 10.32,37.87 15.89,37.87 | 37.01,52.8 37.01,55.29 37.12,55.29 | 37.12,55.29 40.1,55.29 40.77,55.96 40.77,57.31 U4.7 | U4.7 U4.8 | 37.12,55.29 34.74,57.68 U4.3 | R1.2 18.9,40.88 15.89,37.87 | 8.69,47.67 8.69,46.85 TP16.TP | J3.2 165.01,18.61 149.54,18.61
32KHZ  (via drill 0.35)
  Top 0.2: R2_PINH2.1 89.31,61.14 U3.1 89.78,58.31 v90.43,58.31 | v28.35,60.17 18.63,50.45 18.3,50.45 18.17,50.31 18.17,50.06 U1.9
  Bottom 0.2: v90.43,58.31 30.2,58.31 v28.35,60.17
DN  (via drill 0.35)
  Top 0.2: J2.A7 164.82,54.31 165.15,53.98 165.15,53.7 164.76,53.31 J2.B7 164.1,53.21 v163.34,53.21 | D1.4 152.92,53.4 v152.17,52.65
  Bottom 0.2: v163.34,53.21 v163.33,53.21 152.73,53.21 v152.17,52.65
DP  (via drill 0.35)
  Top 0.2: v165.22,54.79 164.22,54.79 J2.B6 164.08,54.69 163.53,54.69 163.4,54.55 163.4,54.07 163.53,53.93 164.08,53.93 J2.A6 | D1.6 155.35,53.9 v156.25,54.81
  Bottom 0.2: v165.22,54.79 156.27,54.79 v156.25,54.81
EPD_3V3
  Top 0.3: TP17.TP 60.68,30.07 61.34,29.41 Q2.2 61.34,19.43 61.34,19.04 66.77,13.62 70.63,13.62 71.04,14.02 J1.16 J1.15 71.53,18.75 72.79,20.01 EPD_C3.2 73.79,21.4 73.79,21.63 | L1.2 76.74,31.75 73.41,28.42 73.41,22.63 73.79,22.25 73.79,21.63 | C6.1 73.79,21.63
EPD_3V3_C
  Top 0.3: TP13.TP 54.79,22.23 55.35,21.67 55.35,19.82 57.95,17.22 59.78,17.22 60.77,18.21 60.77,21.1 59.49,22.39 59.49,22.89 Q2.1 59.37,23 R_CL1.1 | TP13.TP | U1.18 19.57,66.43 19.57,63.27 14.94,58.64 11.37,58.64 6.67,53.94 6.67,40.65 24.36,22.96 TP13.TP
EPD_BUSY  (via drill 0.35)
  Top 0.2: TP9.TP 8.81,68.37 9.36,67.81 9.36,67.56 U1.26 10.55,66.38 10.55,66.12 12.38,64.3 16.1,64.3 16.97,63.42 v16.97,61.92 | v74.76,16.69 74.76,15.47 74.66,15.37 74.66,15 J1.9
  Bottom 0.2: v16.97,61.92 23.2,61.92 28.12,57.01 42.81,57.01 73.28,26.54 73.28,18.17 v74.76,16.69
EPD_CS  (via drill 0.35)
  Top 0.2: U1.11 20.23,49.35 20.23,45.94 20.82,45.35 TP10.TP 22.15,45.35 v25.93,41.57 | J1.12 72.91,15 72.91,15.37 72.13,16.15 v72.13,16.43 | D6.2 59.63,19.09 R9.1 59.57,18.59 v59.03,18.06
  Bottom 0.2: v25.93,41.57 35.52,41.57 v59.03,18.06 60.67,16.43 v72.13,16.43
EPD_DC  (via drill 0.35)
  Top 0.2: U1.5 11.9,48.88 11.9,48.62 10.87,47.6 10.87,46.83 | 10.87,46.83 10.87,40.63 v12.84,38.66 | v73.35,15.95 73.54,15.76 J1.11 | TP11.TP 10.87,46.83
  Bottom 0.2: v12.84,38.66 35.56,15.95 v73.35,15.95
EPD_RST  (via drill 0.35)
  Top 0.2: TP12.TP 17.64,68.56 16.9,67.81 16.9,67.56 U1.21 16.9,66.38 16.9,66.12 17.71,65.31 v17.71,62.93 | v73.87,19.54 74.04,19.37 J1.10
  Bottom 0.2: v17.71,62.93 23.09,62.93 28.69,57.33 42.95,57.33 73.87,26.41 v73.87,19.54
FLASH_CS  (via drill 0.35)
  Top 0.2: R5.1 34.48,53.84 34.45,53.86 33.87,53.86 D9.2 | D9.2 33.92,54.02 33.92,57.96 34.09,58.13 35.24,58.13 35.7,58.59 35.7,59.32 35.29,59.73 35.11,59.73 U4.1 | U1.12 21.98,50.06 21.98,50.31 22.71,51.04 v23.19,51.04 | D9.2 33.64,54.09 v32.37,54.09
  Bottom 0.2: v23.19,51.04 26.24,54.09 v32.37,54.09
GDR
  Top 0.3: R4.2 84.47,20.42 Q3.1 82.85,18.8 81.51,18.8 78.04,15.32 J1.2
GND  (via drill 0.35)
  Top 0.3: U1.29_6 U1.29_3 U1.29_2 | U1.29_6 U1.29_9 U1.29_8 | U1.29_8 U1.29_5 | U1.29_5 | U1.29_5 U1.29_2 | U1.29_2 U1.29_1 U1.29_4 | U1.29_4 U1.29_7 U1.29_8 | U1.29_4 U1.29_5 | U1.29_5 U1.29_6
  other vias: 35.55,55.79 4.49,76.3 152.19,11.78 159.03,9.39 163.05,17.83 122.73,34.87 162.85,58.89 151.96,54.24 153.36,14.72 14.65,62.28 12.85,62.28 9.25,62.28 14.65,60.48 12.85,60.48 9.25,60.48 22.2,60.36 16.8,56.76 18.6,56.76 20.4,56.76 18.6,58.56 20.4,58.56 22.2,58.56 18.6,60.36 20.4,60.36 26.99,56.21 26.99,53.21 25.49,51.71 46.64,63.62 45.29,63.62 41.24,62.27 42.59,62.27 43.94,62.27 45.29,62.27 46.64,62.27 41.24,63.62 42.59,63.62 43.94,63.62 61.56,55.26 59.76,55.26 57.96,55.26 56.16,55.26 54.36,55.26 52.56,55.26 50.76,55.26 61.56,53.46 59.76,53.46 57.96,53.46 56.16,53.46 54.36,53.46 52.56,51.66 54.36,51.66 56.16,51.66 57.96,51.66 59.76,51.66 61.56,51.66 50.76,53.46 52.56,53.46 33.87,109.24 32.07,109.24 30.27,109.24 56.6,108.7 54.8,108.7 67.05,103.43 65.25,103.43 63.45,103.43 61.65,103.43 58.05,103.43 56.25,103.43 67.05,101.63 65.25,101.63 63.45,101.63 61.65,101.63 59.85,99.83 61.65,99.83 63.45,99.83 65.25,99.83 67.05,99.83 68.85,99.83 58.05,101.63 29.85,85.53 28.05,85.53 26.25,85.53 24.45,85.53 22.65,85.53 20.85,85.53 19.05,85.53 28.05,83.73 26.25,83.73 24.45,83.73 19.05,81.93 20.85,81.93 22.65,81.93 24.45,81.93 26.25,81.93 19.05,83.73 20.85,83.73 22.65,83.73 87.12,15.58 85.32,15.58 83.52,15.58 81.72,15.58 52.27,27.54 50.47,27.54 45.07,25.74 46.87,25.74 48.67,25.74 50.47,25.74 52.27,25.74 45.07,27.54 46.87,27.54 48.67,27.54 138.92,49.44 137.12,49.44 135.32,49.44 133.52,49.44 138.92,47.64 137.12,47.64 135.32,47.64 133.52,47.64 161.33,15.6 159.53,15.6 157.73,15.6 161.33,13.8 159.53,13.8 157.73,13.8 151.7,43.56 149.9,43.56 148.1,43.56 146.3,43.56 151.7,41.76 149.9,41.76 148.1,41.76 146.3,41.76
  pour Top: 0.16,110.22 91.88,110.22 91.88,66.89 169.83,66.89 169.83,0.34 82.24,0.34 82.24,10.23 63.36,10.23 63.36,0.38 0.09,0.38 0.09,48.69 6.3,48.69 6.3,67.76 0.16,67.76
  pour Bottom: 0.16,110.22 91.88,110.22 91.88,66.89 169.83,66.89 169.83,66.89 169.83,0.34 82.24,0.34 82.24,10.23 63.36,10.23 63.36,0.38 0.09,0.38 0.09,48.69 6.3,48.69 6.3,67.76 0.16,67.76
GPIO8
  Top 0.2: R1.1 18.85,47.45 U1.10
I2C_PW
  Top 0.3: 154,14.61 U8.2 | 154,14.61 153.2,13.81 U8.8 153.2,11.33 C1.1 155.06,10.57 R1_PINH1.2 155.12,10.51 R2-PINH1.2 158.03,10.51 C2.1 159.81,10.53 166.35,17.08 166.35,20.92 156.25,31.02 156.25,48.94 157.57,50.26 157.57,55.5 147.92,65.15 22.89,65.15 21.93,66.1 21.93,66.43 U1.17 | U8.6 154.53,13.29 154.53,13.61 154,14.13 154,14.61
INT_RTC  (via drill 0.35)
  Top 0.2: U3.3 86.77,61.11 R1_PINH2.1 86.73,61.08 v85.86,61.08 | v27.87,61.94 16.3,50.38 U1.8 16.3,47.73 TP15.TP
  Bottom 0.2: v85.86,61.08 28.73,61.08 v27.87,61.94
IO/BOOT  (via drill 0.35)
  Top 0.2: U1.15 24.58,66.97 v24.95,66.6 | v60.12,105.74 60.59,106.21 R_BOOT.1 61.27,108.68 61.27,108.74 61.41,108.87 61.45,108.87 BOOT_BUTTON.4 BOOT_BUTTON.3 66,109.32 C5.1
  Bottom 0.2: v60.12,105.74 60.12,101.77 v24.95,66.6 | v24.95,66.6
IO/CHANGE  (via drill 0.35)
  Top 0.2: v46.04,105.65 46.04,99.24 20.07,73.27 17.13,73.27 16.41,72.55 16.41,69.87 14.36,67.81 14.36,67.56 U1.23 | v46.01,107.58 45.62,107.58 45.31,107.89 | C9.1 52.25,109.62 CHANGE_BUTTON.3 CHANGE_BUTTON.4 46.45,108.87 46.41,108.87 45.43,107.89 45.31,107.89 | R_CHANGE.1 45.31,107.89
  Bottom 0.2: v46.04,105.65 46.04,107.56 v46.01,107.58
MISO  (via drill 0.35)
  Top 0.2: U4.2 34.53,58.86 R8.1 30.54,58.86 D12.2 30.09,58.61 v28.1,58.61 | J4.P7 4.24,93.69 2.61,92.06 2.61,75.33 TP6.TP 5.9,70 8.09,67.81 8.09,67.56 U1.27 9.28,66.38 9.28,66.12 11.85,63.56 v15.55,63.56
  Bottom 0.2: v15.55,63.56 23.16,63.56 v28.1,58.61
MOSI  (via drill 0.35)
  Top 0.2: 46.19,54.69 46.2,54.69 46.33,54.69 51.74,49.28 71.12,49.28 93.02,27.38 93.02,17.17 91.66,15.81 90.17,15.81 87.78,13.42 73.09,13.42 72.03,14.48 72.04,14.48 J1.14 | 46.19,54.69 D11.2 45.42,54.69 44.45,55.65 v42.97,55.65 42.97,55.85 U4.5 | 15.03,49.38 U1.7 | J4.P3 5.03,89.21 3.91,88.1 3.91,84.3 3.91,78.8 4.05,78.67 5.1,78.67 5.34,78.42 5.34,74.33 7.13,72.54 7.13,70.13 v7.97,69.28 | v11.87,52.51 13.93,50.45 14.31,50.45 14.44,50.31 14.44,49.97 15.03,49.38 | 15.03,49.38 15.03,46.83 TP7.TP | R7.1 46.19,54.69
  Bottom 0.2: v7.97,69.28 7.58,68.89 7.58,54.48 9.55,52.51 11.83,52.51 | 11.83,52.51 v11.87,52.51 | v42.97,55.65 42.21,54.9 14.22,54.9 11.83,52.51
N$1
  Top 0.3: 121.54,36.15 121.54,37.21 121.89,37.57 122.52,37.57 U5.1 122.54,39 124.82,41.28 124.82,42.89 Q1.2 | 121.54,36.15 122,35.68 U5.3 | C1_BAT1.1 D2.1 121.14,36.15 121.54,36.15
N$2
  Top 0.3: R1_BAT.2 120.93,44.88 U7.1
N$3
  Top 0.3: D4.1 68.8,27.89 76.07,35.15 84.25,35.15 85.27,34.13 85.27,23.95 | C3.1 84.98,24.24 85.27,23.95 | 85.27,23.95 85.43,23.79 D3.2
N$4
  Top 0.2: R2_USB.2 161.16,54.52 160.62,55.05 160.62,57.7 163.67,60.76 165.96,60.76 166.37,60.35 166.37,56.49 165.72,55.84 165.72,53.78 165.15,53.21 165.15,53.19 164.77,52.81 J2.A5
N$5
  Top 0.3: R1_BAT.1 121.61,41.96 121.79,41.79 CHG_LED.C
N$7
  Top 0.2: R1_USB.1 161.2,55.82 163.21,57.84 165.46,57.84 166.04,57.25 166.04,56.83 165.07,55.86 164.25,55.86 J2.B5
N$8
  Top 0.2: C_DELAY.1 25.41,101.14 U6.5
N$9
  Top 0.2: EPD_C8.2 68.04,18.34 J1.22
N$10
  Top 0.2: EPD_C6.2 68.98,14.94 J1.20
N$11
  Top 0.2: EPD_C4.2 71.52,19.55 70.04,18.07 J1.18
N$13
  Top 0.3: U7.5 117.43,44.98 117.12,45.29 R2_BAT.2
N$14
  Top 0.2: J1.19 69.66,15 69.66,18.16 70.25,18.75 EPD_C5.2
N$15
  Top 0.2: EPD_C10.2 67.04,16.64 J1.24
N$16
  Top 0.3: R_CAPACITOR.1 94.52,46.91 95.06,47.44 95.39,47.44 D7.1
N$24
  Top 0.2: EPD_C2.2 77.87,17.09 76.54,15.76 J1.5
N$25
  Top 0.2: EPD_C1.2 79.14,17.58 77.16,15.61 77.16,15 J1.4
PREVGH
  Top 0.3: D5.1 70.9,24.82 68.1,22.02 68.1,21.16 EPD_C7.2 67.56,20.22 67.56,19.84 68.53,18.87 J1.21
PREVGL
  Top 0.3: D4.2 64.94,24.94 62.28,22.28 62.28,21.5 62.7,21.08 64.1,21.08 65.31,19.87 | J1.23 67.54,15.59 67.54,15.6 67.54,17.64 65.75,19.43 65.31,19.87 | EPD_C9.2 65.31,19.89 65.31,19.87
RESE
  Top 0.3: R3.2 88.01,20.44 88.01,20.83 87.79,21.06 83.81,21.06 Q3.2 82.21,19.46 81.54,19.46 77.54,15.45 J1.3
RESE'
  Top 0.3: R2.1 89.74,19.71 89.79,19.76 SJ1.2 89.3,19.78 88.68,19.15 88.05,19.15 R3.1 | R2.1
RESET  (via drill 0.35)
  Top 0.2: U1.3 9.95,52.97 v10.18,53.19 | v21.07,102.13 21.63,102.13 | 21.63,102.13 U6.1 | C4.1 27.48,107.93 26.54,108.88 26.49,108.88 RESET_BUTTON.3 RESET_BUTTON.4 22.2,109.62 21.32,108.74 21.32,108.71 R_RESET.1 21.63,106.9 21.63,102.13
  Bottom 0.2: v10.18,53.19 10.18,54.8 11,55.63 11,92.06 v21.07,102.13
RTC_RST  (via drill 0.35)
  Top 0.2: U1.16 | U1.16 v22.65,68.22 | v83.78,61.73 85.5,60.01 U3.4
  Bottom 0.2: v22.65,68.22 29.14,61.73 v83.78,61.73
RX
  Top 0.2: U1.24 13.09,67.56 13.09,67.81 14.65,69.37 TP2.TP
SCK  (via drill 0.35)
  Top 0.2: 41.58,56.06 43.79,53.85 46.71,53.85 51.6,48.95 70.98,48.95 92.46,27.47 92.46,17.08 91.52,16.14 90.03,16.14 87.64,13.75 73.25,13.75 72.54,14.46 J1.13 | 41.58,56.06 41.58,56.77 42.41,57.6 U4.6 45.98,57.68 D10.2 46.17,57.87 R6.1 | J4.P5 4.97,91.44 v3.85,91.44 | v11.81,51.38 12.74,50.45 13.04,50.45 13.17,50.31 13.17,50.06 U1.6 13.17,48.88 13.17,47.09 TP8.TP | 41.58,56.06 41.49,56.06 39.55,54.12 v37.81,54.12
  Bottom 0.2: v3.85,91.44 3.85,70.19 6.41,67.63 6.41,54.48 9.51,51.38 v11.81,51.38 15,54.57 37.36,54.57 v37.81,54.12
SCL  (via drill 0.35)
  Top 0.2: 156.34,16.76 155.6,16.01 U8.4 | U1.20 18.17,67.56 18.17,67.81 19.44,69.08 23.79,69.08 27.03,65.85 148.48,65.85 158.27,56.06 158.27,49.87 156.95,48.55 156.95,31.55 167.05,21.44 167.05,16.73 158.37,8.05 157.51,8.05 | 157.51,8.05 153.85,8.05 151.7,10.2 151.7,16.29 152.96,17.55 155.55,17.55 156.34,16.76 | 157.51,8.05 R2-PINH1.1 | v163.94,21.64 163.98,21.64 J3.4 165.48,20.14 165.97,20.14 165.97,17.23 165.5,16.76 156.34,16.76 | v131.74,48.5 131.31,48.92 U2.7 | v91.65,52.4 91.65,51.82 U3.16
  Bottom 0.2: v163.94,21.64 137.07,48.5 v131.74,48.5 124.6,48.5 120.71,52.4 v91.65,52.4
SDA  (via drill 0.35)
  Top 0.2: U2.8 132.47,51.5 145.55,51.5 150,55.95 156.07,55.95 156.88,55.13 156.88,50.77 155.65,49.53 155.65,28.24 164.3,19.59 J3.3 164.23,19.59 163.9,19.26 v163.87,19.26 | U1.19 19.44,67.56 19.44,67.81 20.38,68.75 23.66,68.75 26.89,65.52 148.14,65.52 157.95,55.71 157.95,50.06 156.62,48.73 156.62,31.18 166.72,21.07 166.72,16.92 159.74,9.93 155.79,9.93 | 155.79,9.93 R1_PINH1.1 | v155.12,16.93 154.8,16.61 U8.3 154.48,16.26 154.48,16.5 154.31,16.67 152.89,16.67 152.72,16.5 152.72,10.68 153.47,9.93 155.79,9.93 | v88.1,51.67 88.1,49.54 U3.15
  Bottom 0.2: v88.1,51.67 120.39,51.67 v155.12,16.93 157.45,19.26 v163.87,19.26
SRC
  Top 0.3: Q3.3 83.71,17.64 85.83,19.76 87.63,19.76 87.66,19.79 88.6,19.79 88.8,19.99 88.8,20.73 88.9,20.83 88.9,20.93 87.07,22.76 84.96,22.76 84.78,22.94 C3.2 83.64,22.94 82.92,23.66 | 82.92,23.66 82.92,31.07 L1.1 | D5.2 78.71,27.87 82.92,23.66
SS_SD  (via drill 0.35)
  Top 0.2: R10.1 6.37,87.24 J4.P2 | U1.4 11.22,55.42 v10.41,56.24 | R10.1 6.37,79.28 5.7,78.6 5.7,75.76 v6.92,74.54 | R10.1 4.68,79.31 D8.2
  Bottom 0.2: v10.41,56.24 8.57,58.08 8.57,72.89 v6.92,74.54
TX
  Top 0.2: TP1.TP 11.77,67.52 U1.25
USB_D+
  Top 0.2: U1.14 23.92,55.11 27.9,59.09 27.98,59.09 29.97,61.08 35.37,61.08 39.06,64.77 107.12,64.77 120.01,51.88 120.01,43.06 120.39,42.69 121.47,42.69 121.61,42.82 121.61,43.92 121.93,44.24 124.57,44.24 126.33,46.01 142.89,46.01 151.78,54.9 D1.1
USB_D-
  Top 0.2: U1.13 23.25,48.88 23.25,48.62 23.38,48.49 24.47,48.49 31.17,55.19 31.17,58.01 31.45,58.29 33.78,58.29 33.95,58.46 35.1,58.46 35.32,58.67 35.32,59.23 35.15,59.4 34.46,59.4 33.92,59.94 33.92,60.5 34.09,60.67 35.43,60.67 39.2,64.44 106.96,64.44 119.61,51.79 119.61,41.64 120.16,41.09 122.95,41.09 122.96,41.1 123.3,41.1 123.5,41.3 123.5,42.2 123.28,42.42 122.22,42.42 121.94,42.7 121.94,43.78 122.07,43.92 124.7,43.92 126.28,45.5 144.01,45.5 152.41,53.9 D1.3
VBAT
  Top 0.3: C2_BAT.1 122.49,46.88 U7.3 | C2_BAT.1 122.43,47.05 122.43,50.11 TP3.TP | C2_BAT.1 122.54,45.89 123.09,45.34 Q1.3 123.72,45.54 124.16,45.54 125.45,46.84 126.46,46.84 127.95,48.34 128.34,48.34 U2.3 U2.2
VBUS
  Top 0.3: TP14.TP 117.55,50.62 117.47,50.55 117.47,50.37 117.5,50.34 117.49,50.34 C1_BAT.1 117.5,47.61 U7.4 118.29,46.82 118.29,46.38 119.16,45.51 119.16,41.45 121.54,39.07 | 121.54,39.07 120.51,38.04 D2.2 | R_PWRUSB.2 118.94,37.37 120.26,37.37 D2.2 | 152.99,46.41 153.61,47.03 C4_USB.1 C3_USB.1 153.61,52.19 154.82,53.4 D1.5 | PFMF.050.1.2 152.99,45.71 152.99,46.41 | 121.54,39.07 123.19,40.72 123.6,40.72 124.14,41.26 CHG_LED.A 124.13,42.14 123.03,43.24 Q1.1 | D2.2 120.51,36.76 119.78,36.03 119.78,35.01 119.78,35 119.78,33.51 120.09,33.2 122.41,33.2 123.45,34.24 123.45,34.66 124.18,35.38 124.18,38.82 125.31,39.96 125.31,44 126.44,45.12 151.71,45.12 152.99,46.41
VRTC
  Top 0.3: C7.1 89.24,47.54 89.9,48.21 R_CAPACITOR.2 | C7.1 86.69,47.54 86.04,46.89 C_SUPERCAP.2 | U3.14 86.77,47.56 C7.1
VUSB
  Top 0.3: PFMF.050.1.1 158.87,45.37 158.88,45.37 158.88,47.48 163.17,51.78 | J2.A9 J2.B4 164.13,56.24 163.51,56.24 162.81,55.54 162.81,52.14 163.17,51.78 | J2.B9 J2.A4 164.13,51.44 163.51,51.44 163.17,51.78